# EAGLE board Qtouch (EAGLE 5.12)
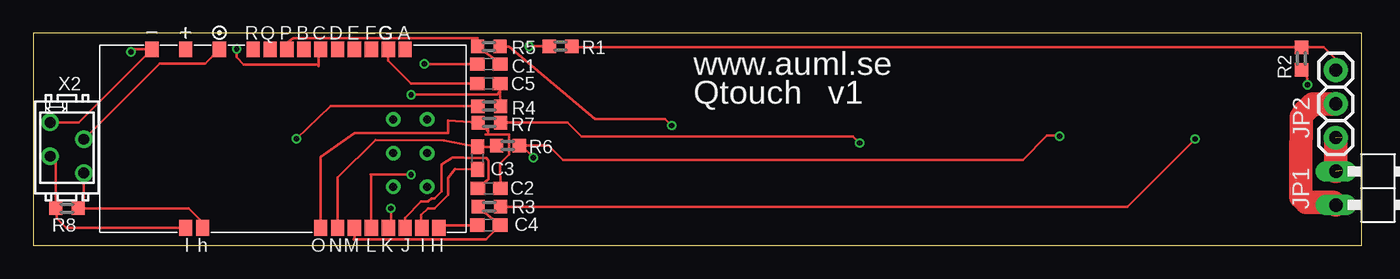
[diagram p0: board, top side]
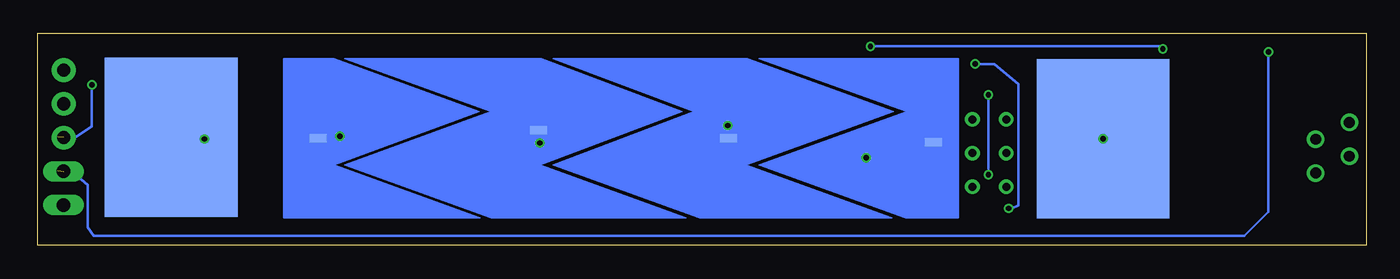
[diagram p1: board, bottom side, seen from below]

Size 100 x 16 mm. Coordinates in mm from the lower left corner, seen from the top.
Outline: 100,0 100,16 0,16 0,0 100,0
Copper layers (1*16): Top 0.035mm / dielectric 1.5mm / Bottom 0.035mm
Design rules "ITead_rule": minimum track width 6mil, minimum drill 12mil, track to track 6mil, track to pad 6mil, pad to pad 6mil, via to via 6mil, smd to smd 0mil, copper to edge 10mil, drill to drill 10mil, minimum pad ring 10mil, minimum via ring 6mil, stop-mask expansion 2mil, vias tented up to drill 100mil, thermal gap 10mil

## Footprints (pad centres in the part's own frame; a part is rotated, then mirrored left to right if it is on the bottom)
BUTTON_12X12MM = smd 10 x 12: P$1 0,0
C0603 = smd 1.1 x 1: 1 -0.85,0; 2 0.85,0
1X02/90 = drill 1.016 long: 1 -1.27,-3.81; 2 1.27,-3.81
1X03 = drill 1 pad 1.778 round: 1 -2.54,0; 2 0,0; 3 2.54,0
R0603@1 = smd 0.991 x 1.016: 1 -0.85,0; 2 0.85,0
SLIDER_6MM_50MM = smd 1.27 x 0.635: CH0 17.3,6; CH1 31.6,5.4; CH2_1 1.9,6.3; CH2_2 48.2,6
CORETWO_LAYOUT_ISPHOLES_CU = smd 1 x 1.2: 5V 7.315,-6.648; A -9.195,-6.648; B -1.575,-6.648; C -2.845,-6.648; CANH 6.045,6.814; CANL 7.315,6.814; D -4.115,-6.648; E -5.385,-6.648; F -6.655,-6.648; G -7.925,-6.648; GND 9.855,-6.648; H -11.735,6.814; I -10.465,6.814; J -9.195,6.814; K -7.925,6.814; L -6.655,6.814; M -5.385,6.814; N -4.115,6.814; O -2.845,6.814; P -0.305,-6.648; Q 0.965,-6.648; R 2.235,-6.648; VCAN 4.775,-6.648 | drill 0.6 round: P$1 -10.846,3.708; P$2 -8.306,3.708; P$3 -10.846,1.168; P$4 -8.306,1.168; P$5 -8.306,-1.372; P$6 -10.846,-1.372
MICROMATCH-4 = drill 0.813 round: 1 1.905,1.27; 2 0.635,-1.27; 3 -0.635,1.27; 4 -1.905,-1.27

## Placement (x,y rotation side)
B1  BUTTON  [BUTTON_12X12MM]  89.96,8.16 0 bottom
B2  BUTTON  [BUTTON_12X12MM]  19.81,8.04 0 bottom
C1  [C0603]  34.29,13.66 0 top
C2  [C0603]  34.31,4.3 0 top
C3  [C0603]  33.45,6.58 90 top
C4  [C0603]  34.29,1.52 0 top
C5  [C0603]  34.29,12.19 0 top
JP1  [1X02/90]  101.86,4.32 270 top
JP2  [1X03]  98.04,10.67 270 top
R1  [R0603@1]  39.69,15.02 0 top
R2  [R0603@1]  95.45,14.08 90 top
R3  [R0603@1]  34.33,2.92 180 top
R4  [R0603@1]  34.32,10.5 0 top
R5  [R0603@1]  34.29,14.99 0 top
R6  [R0603@1]  35.73,7.52 0 top
R7  [R0603@1]  34.33,9.26 0 top
R8  [R0603@1]  2.54,2.79 180 top
U$1  SLIDER  [SLIDER_6MM_50MM]  30.69,14.08 180 bottom
X1  CORETWO_LAYOUTISPHOLES_CU  [CORETWO_LAYOUT_ISPHOLES_CU]  18.8,8.13 180 top
X2  MICROMATCH-4  [MICROMATCH-4]  2.54,7.37 90 top

## Library data of the parts
B1 B2 U$1 = qtouch
C1-C5 R1-R8 = rcl
JP1 = pinhead
JP2 = pinhead-mm
X1 = expboard
X2 = con-amp-micromatch; MPN: 7-215464-4; OC_FARNELL: 3784629; OC_NEWARK: 19R8124

## Nets
CANH: R8.1 X1.CANH X2.4
CANL: R8.2 X1.CANL X2.3
CH0: R5.2 U$1.CH0
CH1: R7.2 U$1.CH1
CH2: R6.2 U$1.CH2_1 U$1.CH2_2
CH3: B1.P$1 R3.1
CH4: B2.P$1 R4.1
EXP_L: C5.2 R4.2 X1.L
EXP_M: C4.2 R3.2 X1.M
EXP_N: C3.2 R6.1 X1.N
EXP_O: C2.2 R7.1 X1.O
EXP_P: C1.2 R5.1 X1.P
GND: JP1.1 JP2.3 R2.1 X1.GND X2.1
N$1: JP2.1 R1.2 R2.2
N$2: C1.1 X1.K
N$3: C2.1 X1.J
N$4: C3.1 X1.I
N$5: C4.1 X1.H
N$6: C5.1 X1.G
N$10: JP1.2 JP2.2
PWM: R1.1 X1.C
V_CAN: X1.VCAN X2.2
VCC: X1.5V

## Tracks (layer width: path | path; a pad name or v marks a point on that pad's centre or on a via)
CANH
  Top 0.2: X2.4 3.81,3.21 R8.1 11.68,2.79 12.7,1.78 12.7,1.36 X1.CANH
CANL
  Top 0.2: X1.CANL 2.5,1.31 1.78,2.03 1.78,2.71 R8.2 1.69,6.31 X2.3
CH0  (via drill 0.4)
  Top 0.2: R5.2 35.83,14.99 42.27,9.53 47.57,9.53 v48.06,9.04
  Bottom 0.2: v48.06,9.04 48.06,8.15 U$1.CH0
CH1  (via drill 0.4)
  Top 0.2: R7.2 40.23,9.26 41.28,8.21 61.71,8.21 v62.2,7.72
  Bottom 0.2: v62.2,7.72 62.2,8.59 U$1.CH1
CH2  (via drill 0.4)
  Top 0.2: v77.26,8.24 77.23,8.27 76.3,8.27 74.48,6.45 39.87,6.45 38.8,7.52 R6.2 36.75,7.52 v37.65,6.62
  Bottom 0.2: v77.26,8.24 78.74,8.24 U$1.CH2_2 | v37.65,6.62 33.76,6.62 U$1.CH2_1
CH3  (via drill 0.4)
  Top 0.2: R3.1 82.36,2.92 v87.46,8.02
  Bottom 0.2: v87.46,8.02 89.82,8.02 B1.P$1
CH4  (via drill 0.4)
  Top 0.2: R4.1 22.4,10.51 B2.P$1
  other vias: 19.81,8.04
EXP_L  (via drill 0.4)
  Top 0.2: 35.14,11.62 C5.2 | 35.14,11.62 R4.2 | X1.L 25.45,5.28 25.4,5.33 v28.45,5.33 | v28.45,11.36 34.92,11.37 35.14,11.62
  Bottom 0.2: v28.45,5.33 v28.45,11.36
EXP_M
  Top 0.2: X1.M 24.18,0.56 24.11,0.46 34.1,0.46 C4.2 R3.2
EXP_N
  Top 0.2: X1.N 22.91,5.13 25.78,7.95 30.92,7.93 C3.2 34.86,7.43 R6.1
EXP_O
  Top 0.2: X1.O 21.64,6.66 24.17,8.49 30.85,8.48 31.23,8.48 31.23,9.4 R7.1 34.04,8.8 34.23,8.6 34.23,8.94 34.25,8.94 34.25,8.35 | C2.2 35.14,6.18 35.81,6.86 35.83,8.35 34.25,8.35 | 34.25,8.35 34.06,8.35
EXP_P
  Top 0.2: X1.P 19.1,15.29 19.55,15.63 33.43,15.63 R5.1 35.14,13.74 C1.2
GND  (via drill 0.4)  (2 unrouted)
  Top 0.2: X2.1 3.44,9.27 X1.GND 7.56,14.78 v7.36,14.58 | R2.1 95.87,12.82 v95.92,12.11
  Top 1.778: JP2.3 JP1.1
  Bottom 0.2: v95.92,12.11 95.92,8.97 97.15,8.19 98.49,8.19 | v7.36,14.58 7.36,2.54 9.19,0.71 95.8,0.71 96.22,1.35 96.22,4.57 97.51,5.64 98.5,5.64
N$1
  Top 0.2: R2.2 96.83,14.93 | R2.2 40.63,14.93 R1.2 | R2.2 97.14,14.93 98.03,14.04 JP2.1
N$2  (via drill 0.4)
  Top 0.2: C1.1 33.42,13.67 v29.45,13.67 | v26.92,2.79 26.92,1.52 X1.K
  Bottom 0.2: v29.45,13.67 27.99,13.68 26.19,12.15 26.19,3.01 26.67,2.79 v26.92,2.79
N$3
  Top 0.2: X1.J 27.99,2.08 29.21,3.3 29.72,3.3 29.97,3.56 30.23,3.56 30.73,4.06 30.73,6.1 31.58,6.62 32.34,6.62 32.53,6.6 34.14,6.58 34.28,6.38 34.27,5.02 C2.1
N$4
  Top 0.2: C3.1 31.75,5.76 31.24,5.08 31.24,3.81 30.23,2.79 29.72,2.79 29.21,2.29 29.21,1.36 X1.I
N$5
  Top 0.2: X1.H 30.53,1.52 C4.1
N$6
  Top 0.2: X1.G 26.72,13.92 28.45,12.19 C5.1
N$10
  Top 1.778: JP2.2 96.32,10.67 95.65,10 95.43,9.67 95.41,6.22 95.41,3.65 95.81,3.25 97.85,3.25 JP1.2
PWM  (via drill 0.4)
  Top 0.2: R1.1 v37.33,15.02 v37.32,15.01 | v15.31,14.81 15.31,14.18 15.85,13.64 21.36,13.64 21.5,13.5 21.5,14.64 X1.C
  Bottom 0.2: v37.32,15.01 15.51,15.01 v15.31,14.81
V_CAN
  Top 0.2: X1.VCAN 12.95,13.72 9.53,13.72 X2.2

## Text on the board
tNames: www.auml.se | Qtouch | v1
Document: Creative Commons Attribution-Share Alike 3.0 Unported License | This work by http://projekt.auml.se is licensed under a | http://creativecommons.org/licenses/by-sa/3.0/